# Altium PCB A车主板模版.PcbDoc
Units mil, origin at the board's own origin, x right, y up, seen from the top; angles counter-clockwise.
Board outline 10400 x 7050 mil, 2 copper layers (Top Layer, Bottom Layer); 9 components, 0 nets, 81 pads, 0 vias.
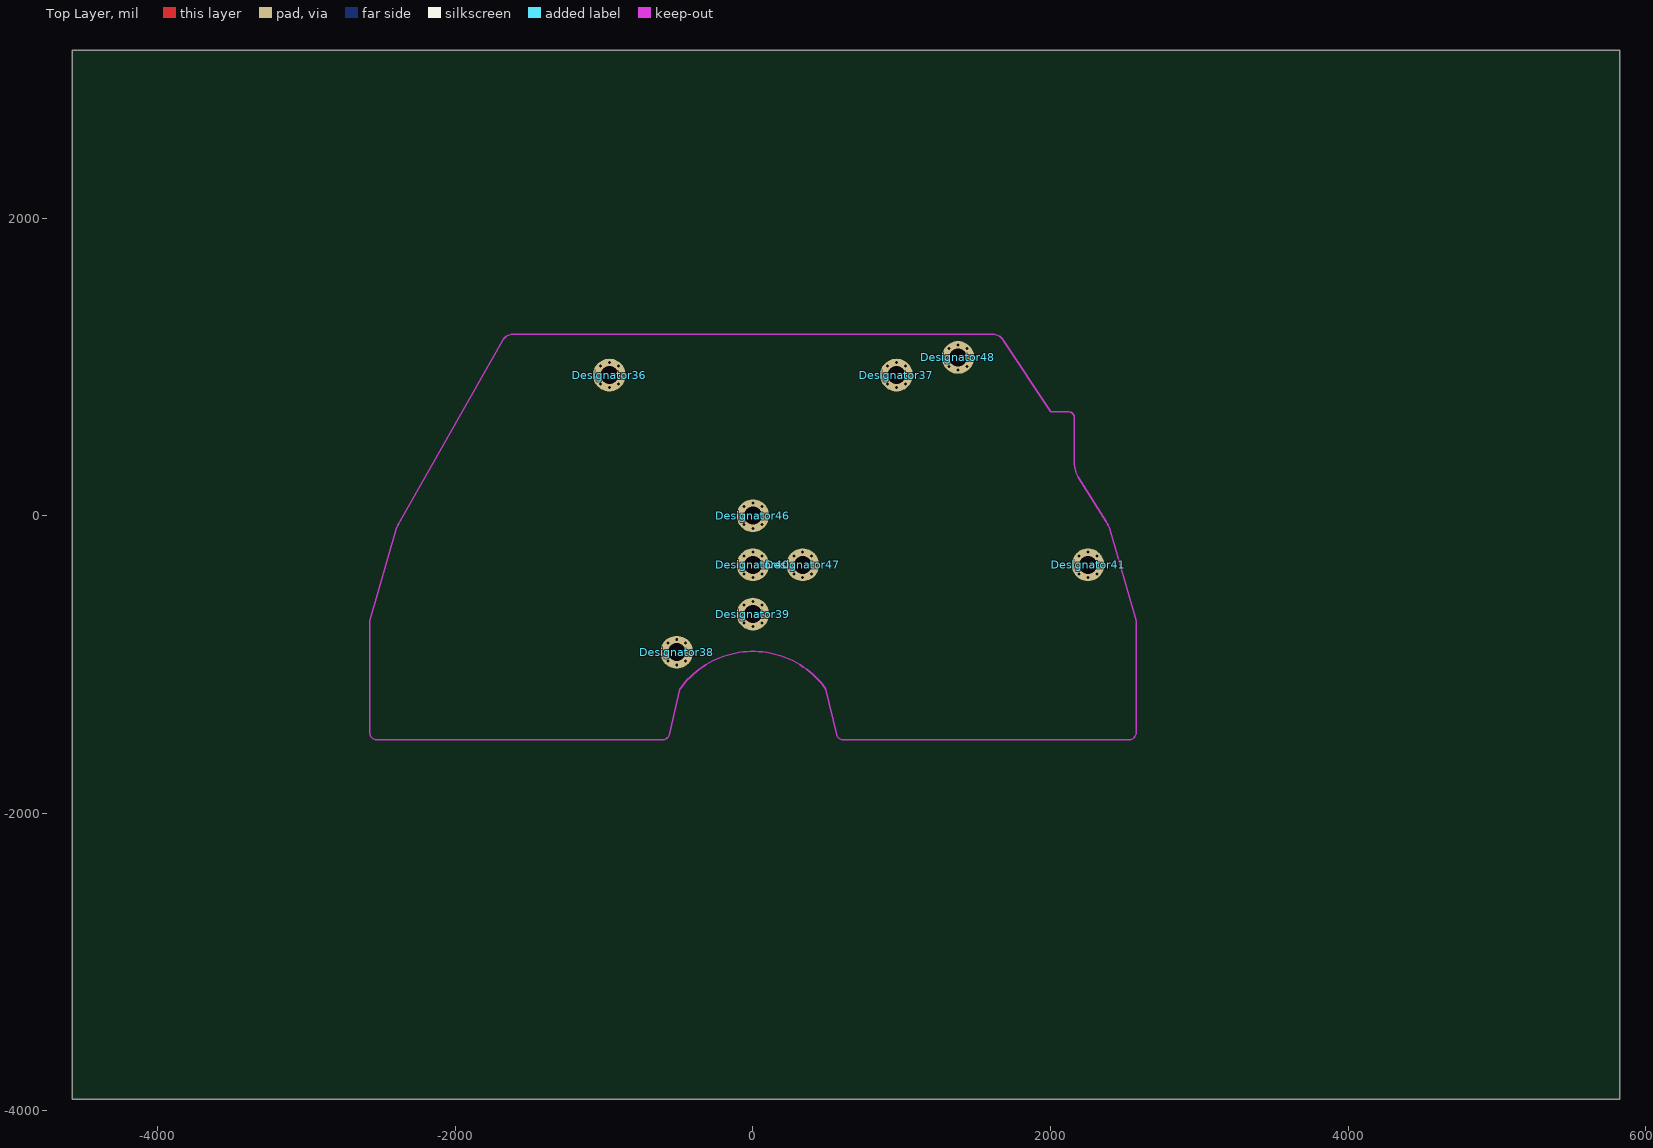
[diagram p0: Top Layer view]
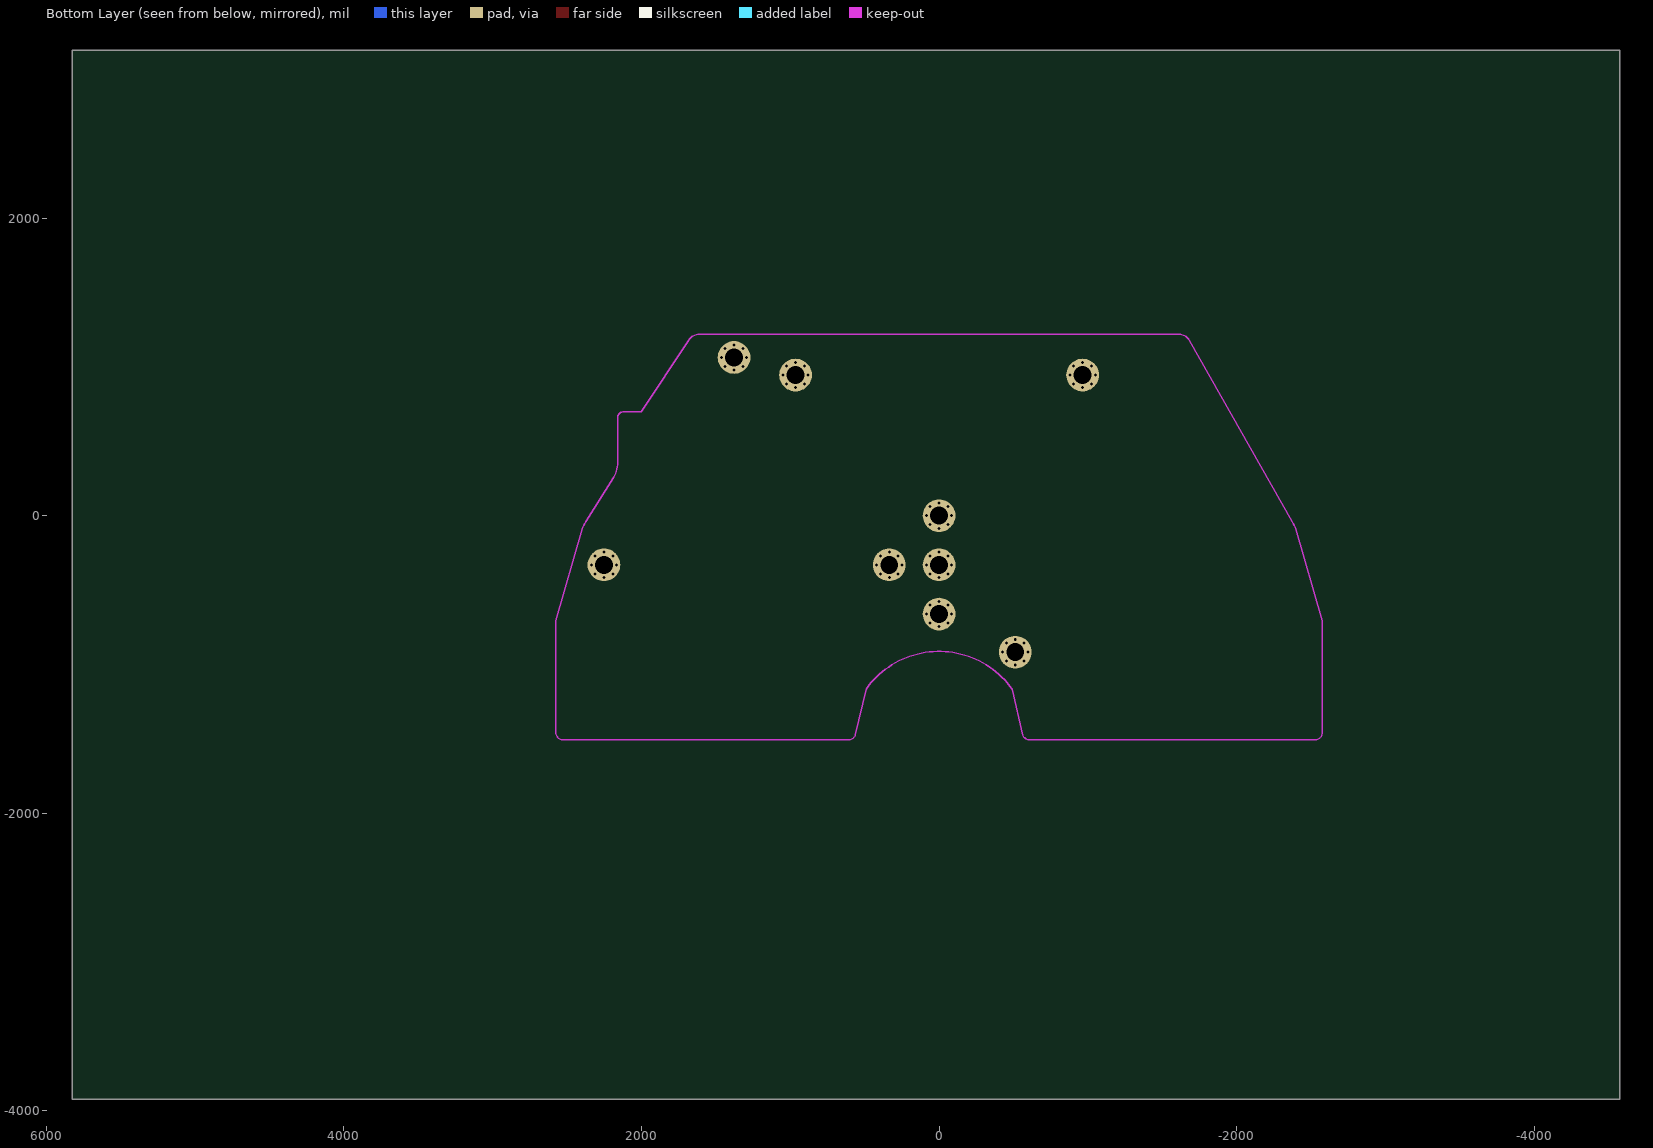
[diagram p1: Bottom Layer view, seen from below]

## Layer stack, top to bottom
Top Solder: solder mask 0.4, Solder Resist, Dk 3.5
Top Layer: signal copper 1.4
Dielectric 1: dielectric 12.6, FR-4, Dk 4.8
Bottom Layer: signal copper 1.4
Bottom Solder: solder mask 0.4, Solder Resist, Dk 3.5

## Board outline
-4574.49,-3922.05 -4574.49,3127.95 5825.51,3127.95 5825.51,-3922.05

## Design rules (kind name [scope] priority, off if disabled: settings)
Clearance [All] p1: gap=8
ComponentClearance [All] p1: gap=0 collisioncheckmode=3 verticalgap=0 showdistances=FALSE
HoleSize [All] p1: absolutevalues=TRUE maxlimit=200 minlimit=5 maxpercent=80.000 minpercent=20.000
PlaneClearance [All] p1: clearance=10
PlaneConnect [All] p1: planeconnectstyle=Direct reliefexpansion=20 reliefentries=4 reliefconductorwidth=10 reliefairgap=10
PolygonConnect [All] p1: connectstyle=Direct reliefconductorwidth=10 reliefentries=4 polygonreliefangle="90 Angle" airgapwidth=10
RoutingVias [All] p1: holewidth=15 width=25 viastyle="Through Hole" minholewidth=5 minwidth=10 maxholewidth=180 maxwidth=200
ShortCircuit [InNet('No Net') vs InNet('No Net')] p1: allowed=TRUE
SilkToSilkClearance [All] p1: silktosilkclearance=0
SolderMaskExpansion [All] p1: expansion=4
Width [All] p1: maxlimit=200 minlimit=8 preferedwidth=100
24 further rules are at their usual default settings.

## Components (designator, comment, footprint, x,y, rotation, side; value= is the part's Value field where it differs from the comment)
Designator36 "Comment" 螺丝固定过孔 -964.57,944.88 r0 top
Designator37 "Comment" 螺丝固定过孔 964.57,944.88 r0 top
Designator38 "Comment" 螺丝固定过孔 -511.81,-917.32 r0 top
Designator39 "Comment" 螺丝固定过孔 0,-661.42 r0 top
Designator40 "Comment" 螺丝固定过孔 0,-330.71 r0 top
Designator41 "Comment" 螺丝固定过孔 2251.97,-330.71 r0 top
Designator46 "Comment" 螺丝固定过孔 0,0 r0 top
Designator47 "Comment" 螺丝固定过孔 334.65,-330.71 r0 top
Designator48 "Comment" 螺丝固定过孔 1377.95,1062.99 r0 top

## Footprints (in the part's own frame and the unit in brackets; to place one, negate y for a bottom-side part, rotate by r counter-clockwise, add the part's x,y. Pads: shape width x height; smd on the part's side, far side on the other; paste and mask are expansions set on the pad)
螺丝固定过孔 [mil] "螺丝固定过孔"
  round 30 hole 20: 1(-85,0) 1(-60,-60) 1(-60,60) 1(0,-85) 1(0,85) 1(60,-60) 1(60,60) 1(85,0)
  round 220 hole 120 unplated: 1(0,0)

## Nets (pads, with @x,y where several pads share a name; then routed paths per layer and width w, separated by ;. In a path a pad name is that pad's centre, name@x,y a point inside that pad or via, vN(x,y) a via of type N, cw(c..) or ccw(c..) an arc to the next point about the centre after c; other vN are vias at no path point)
pads on no net: Designator36.1 Designator37.1 Designator38.1 Designator39.1 Designator40.1 Designator41.1 Designator46.1 Designator47.1 Designator48.1

## Keep-outs
Keep-Out Layer:
  lines w10: -2575,-1457.05 ccw(c-2525,-1457.05) -2525,-1507.05 -610,-1507.05 ccw(c-610,-1457.05) -563.01,-1474.13 -490.29,-1166.19 cw(c0,-1512.05) 490.29,-1166.19 562.21,-1471.75 ccw(c610,-1457.05) 610,-1507.05 2525,-1507.05 ccw(c2525,-1457.05) 2575,-1457.05 2575,-707.05 2397.94,-88.64 ccw(c2210,-157.05) 2373.83,-42.33 2186.79,257.95 cw(c2360,357.95) 2160,357.95 2160,657.95 ccw(c2120,657.95) 2120,697.95 2000,697.95 1682.36,1178.58 ccw(c1614.17,1139.21) 1614.17,1217.95 -1614.17,1217.95 ccw(c-1614.17,1139.21) -1682.36,1178.58 -2373.83,-42.33 ccw(c-2210,-157.05) -2397.94,-88.64 -2575,-707.05 -2575,-1457.05